# Altium PCB Load_Tester.PcbDoc
Units mil, origin at the board's own origin, x right, y up, seen from the top; angles counter-clockwise.
Board outline 1944 x 2589 mil, 2 copper layers (Top Layer, Bottom Layer); 81 components, 62 nets, 264 pads, 104 vias.
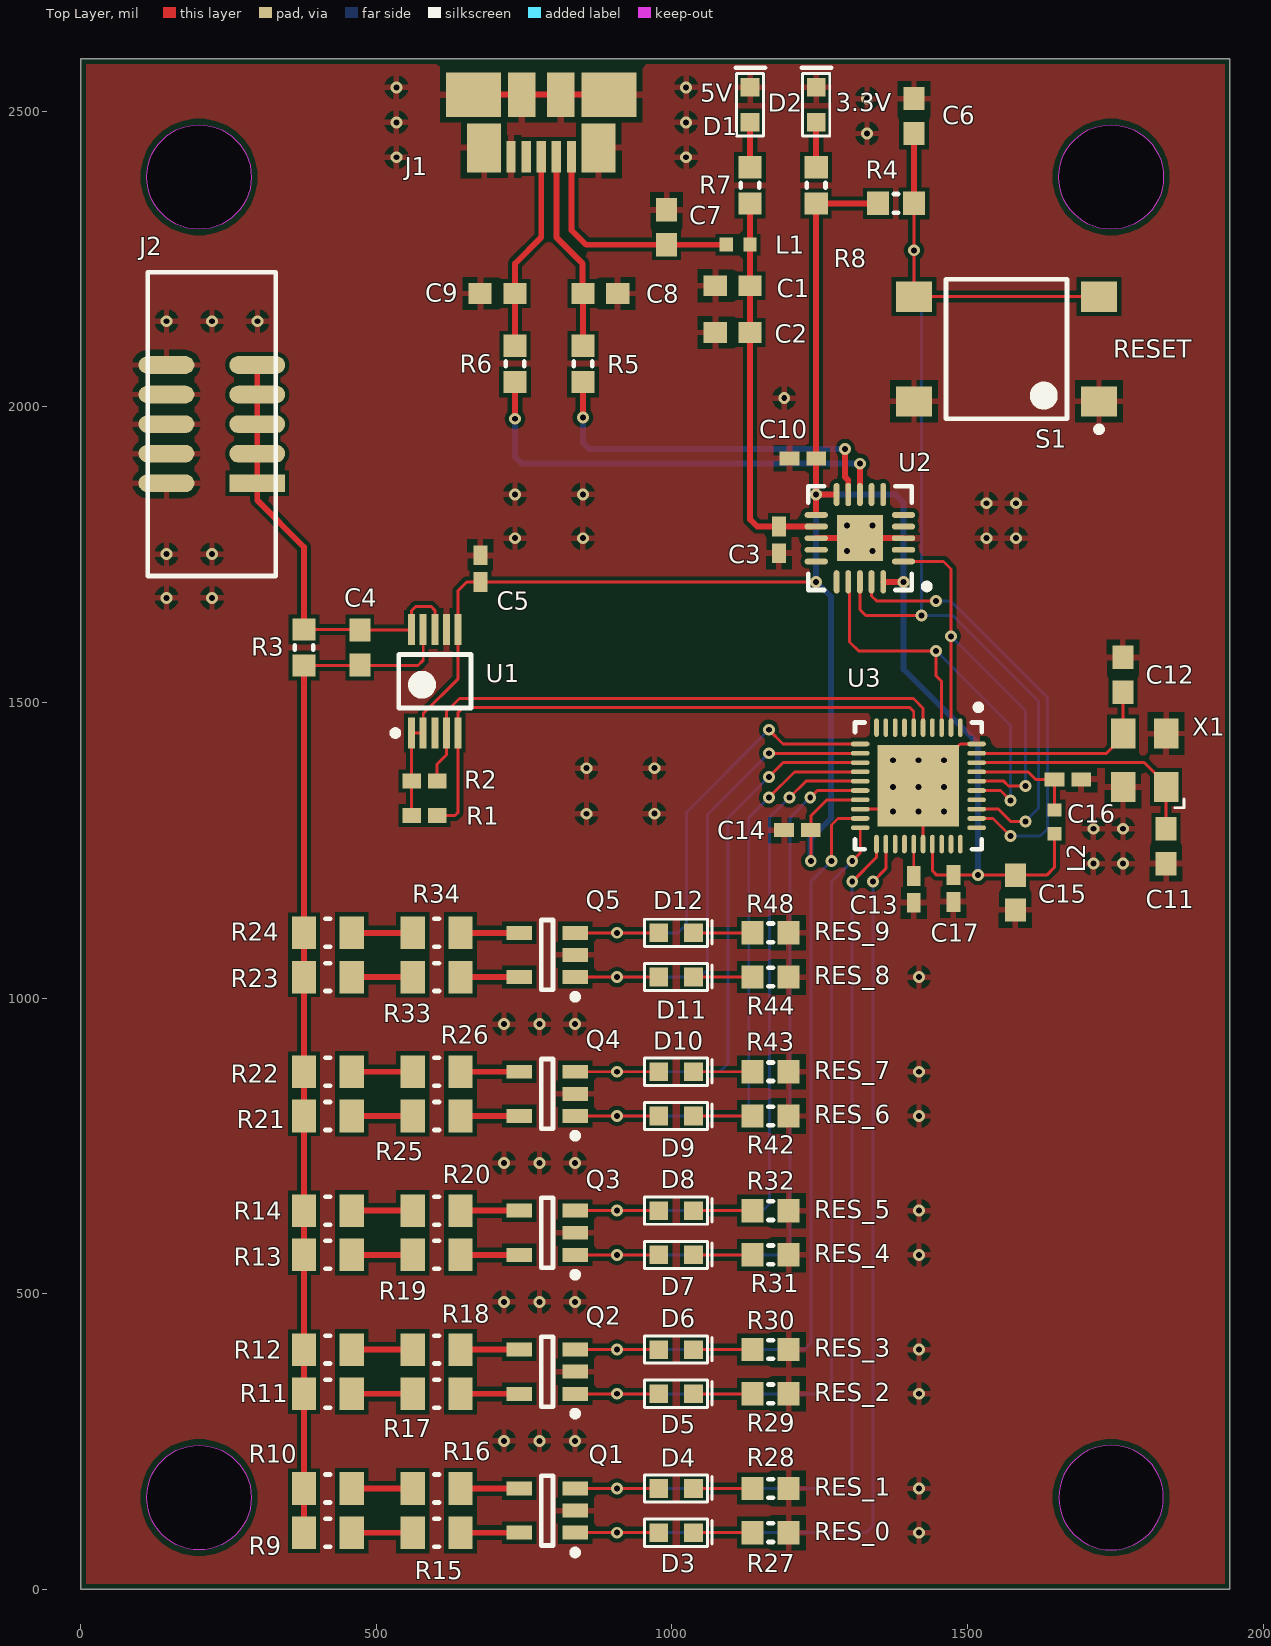
[diagram p0: Top Layer view]
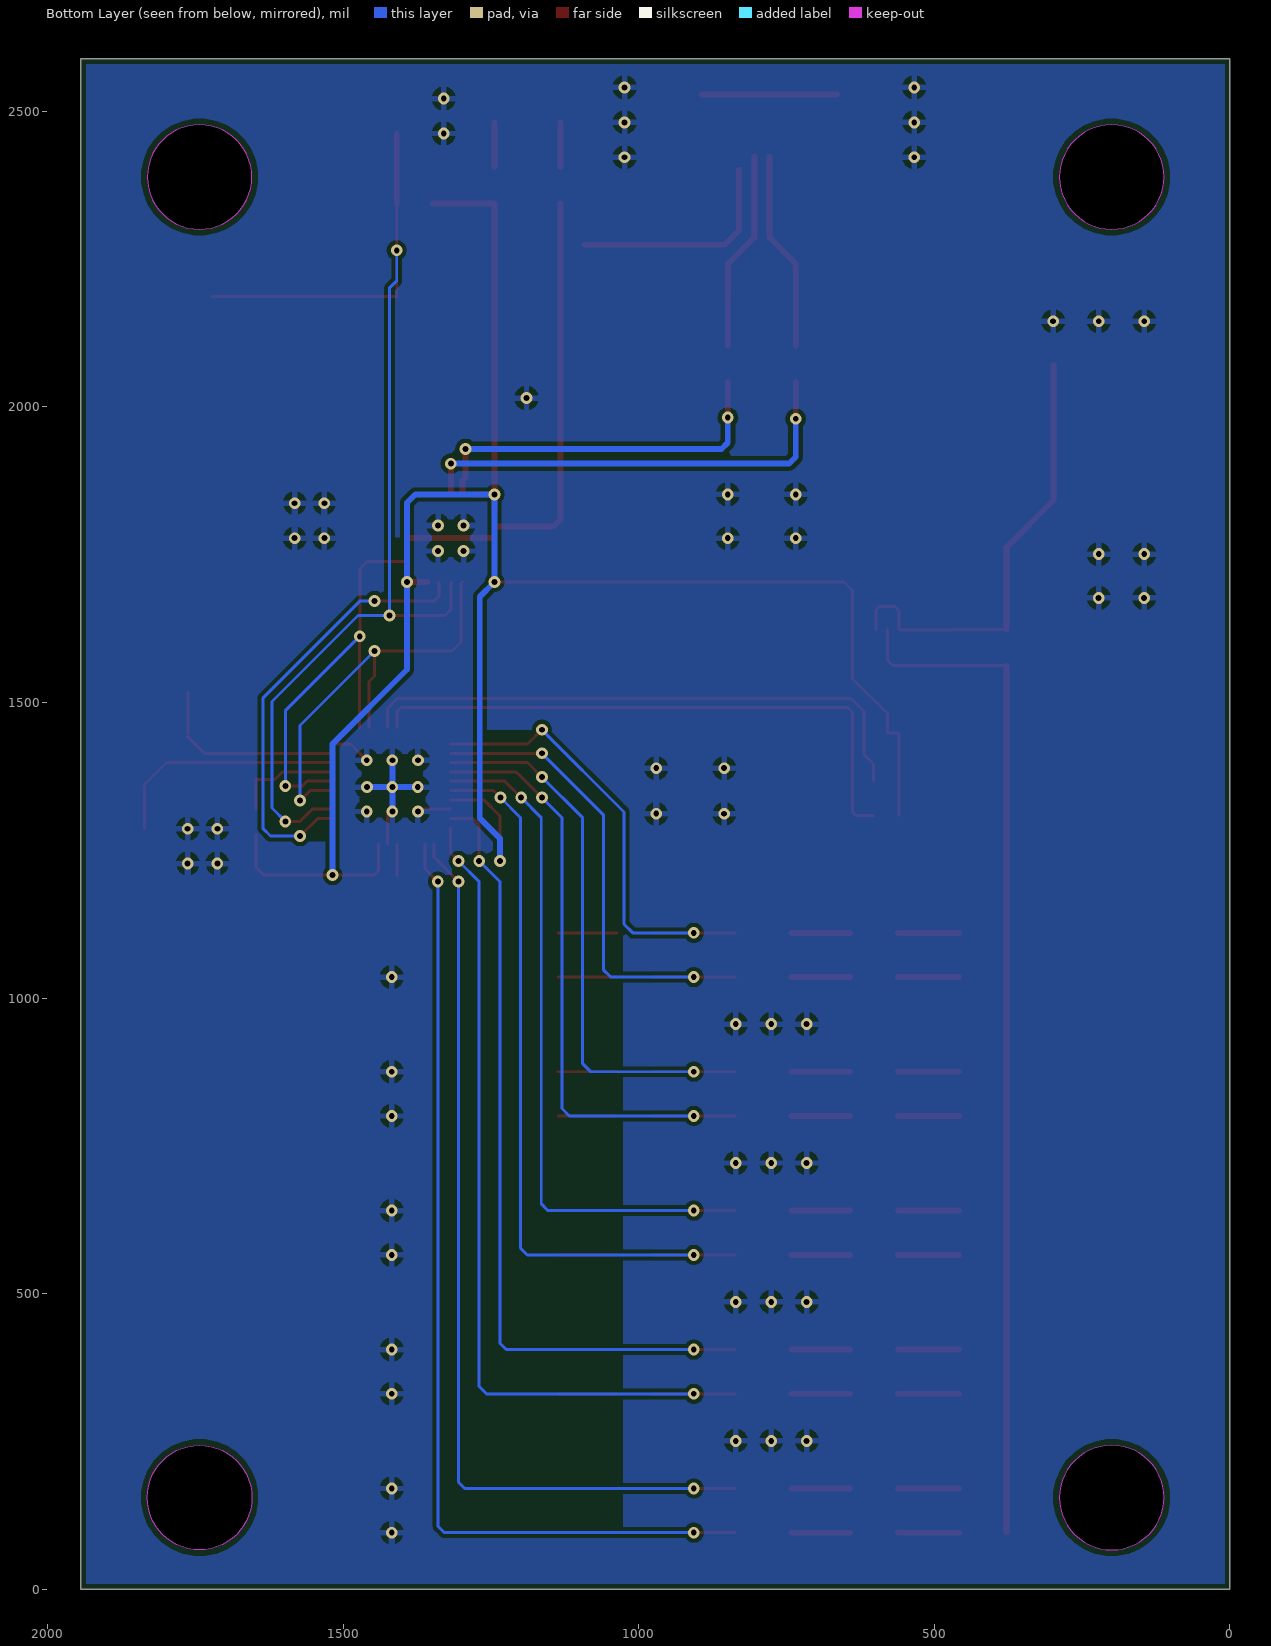
[diagram p1: Bottom Layer view, seen from below]

## Layer stack, top to bottom
Top Solder: solder mask 0.4, Solder Resist, Dk 3.5
Top Layer: signal copper 1.4
Dielectric 1: dielectric 12.6, FR-4, Dk 4.8
Bottom Layer: signal copper 1.4
Bottom Solder: solder mask 0.4, Solder Resist, Dk 3.5

## Board outline
0,0 1944,0 1944,2589 0,2589
cut-out: 200,2300.5 cw(c200,2389) 111.5,2389 cw(c200,2389) 200,2477.5 cw(c200,2389) 288.5,2389 cw(c200,2389)
cut-out: 1743,2300.5 cw(c1743,2389) 1654.5,2389 cw(c1743,2389) 1743,2477.5 cw(c1743,2389) 1831.5,2389 cw(c1743,2389)
cut-out: 1654.5,155 ccw(c1743,155) 1743,66.5 ccw(c1743,155) 1831.5,155 ccw(c1743,155) 1743,243.5 ccw(c1743,155)
cut-out: 200,66.5 cw(c200,155) 111.5,155 cw(c200,155) 200,243.5 cw(c200,155) 288.5,155 cw(c200,155)

## Design rules (kind name [scope] priority, off if disabled: settings)
Clearance [All] p1: gap=7
PolygonConnect [All] p1: connectstyle=Relief reliefconductorwidth=10 reliefentries=4 polygonreliefangle="90 Angle" airgapwidth=10
RoutingVias [All] p1: holewidth=10 width=20 viastyle="Through Hole" minholewidth=10 minwidth=20 maxholewidth=10 maxwidth=20
SolderMaskExpansion [All] p1: expansion=4
Width [All] p1: maxlimit=10 minlimit=5 preferedwidth=5
30 further rules are at their usual default settings.

## Components (designator, comment, footprint, x,y, rotation, side; value= is the part's Value field where it differs from the comment)
C1 "CAP CER 4.7UF 35V X5R 0603" 0603_Cap_Generic 1102.65,2205 r0 top
C2 "CAP CER 22UF 10V X5R 0603" 0603_Cap_Generic 1102.65,2126 r180 top
C3 "CAP CER 0.1UF 25V X7R 0402" 0402_CAP_Generic 1181,1775.05 r90 top
C4 "CAP CER 0.1UF 25V X7R 0603" 0603_Cap_Generic 472,1593.09 r270 top
C5 "CAP CER 0.1UF 25V X7R 0402" 0402_CAP_Generic 676,1726.64 r90 top
C6 "CAP CER 1000PF 50V X7R 0603" 0603_Cap_Generic 1409.51,2492.13 r90 top
C7 "CAP CER 10000PF 50V X7R 0603" 0603_Cap_Generic 991,2304 r90 top
C8 "CAP CER 47PF 50V C0G 0603" 0603_Cap_Generic 879,2192 r0 top
C9 "CAP CER 47PF 50V C0G 0603" 0603_Cap_Generic 705.02,2192 r180 top
C10 "CAP CER 0.1UF 25V X7R 0402" 0402_CAP_Generic 1221.36,1913 r180 top
C11 "CAP CER 18PF 50V C0G 0603" 0603_Cap_Generic 1836,1257 r270 top
C12 "CAP CER 18PF 50V C0G 0603" 0603_Cap_Generic 1763,1547 r270 top
C13 "CAP CER 0.47UF 10V X5R 0402" 0402_CAP_Generic 1409.13,1184 r90 top
C14 "CAP CER 0.1UF 25V X7R 0402" 0402_CAP_Generic 1212.36,1284 r180 top
C15 "CAP CER 10UF 10V JB 0603" 0603_Cap_Generic 1581,1178.47 r270 top
C16 "CAP CER 0.1UF 25V X7R 0402" 0402_CAP_Generic 1670,1370 r0 top
C17 "CAP CER 4.7UF 10V X5R 0402" 0402_CAP_Generic 1476,1185.36 r270 top
D1 "LED SMARTLED GREEN 570NM 0603" 0603_LED_with_mark 1132.18,2511 r90 top
D2 "LED SMARTLED GREEN 570NM 0603" 0603_LED_with_mark 1244,2511 r90 top
D3 "LED SMARTLED RED 630NM 0603 SMD" 0603_Diode-LED_Generic 1007,95.65 r0 top
D4 "LED SMARTLED RED 630NM 0603 SMD" 0603_Diode-LED_Generic 1007,170.4 r0 top
D5 "LED SMARTLED RED 630NM 0603 SMD" 0603_Diode-LED_Generic 1007,330.6 r0 top
D6 "LED SMARTLED RED 630NM 0603 SMD" 0603_Diode-LED_Generic 1007,405.4 r0 top
D7 "LED SMARTLED RED 630NM 0603 SMD" 0603_Diode-LED_Generic 1007,565.6 r0 top
D8 "LED SMARTLED RED 630NM 0603 SMD" 0603_Diode-LED_Generic 1007,640.4 r0 top
D9 "LED SMARTLED RED 630NM 0603 SMD" 0603_Diode-LED_Generic 1007,800.6 r0 top
D10 "LED SMARTLED RED 630NM 0603 SMD" 0603_Diode-LED_Generic 1007,875.4 r0 top
D11 "LED SMARTLED RED 630NM 0603 SMD" 0603_Diode-LED_Generic 1007,1035.6 r0 top
D12 "LED SMARTLED RED 630NM 0603 SMD" 0603_Diode-LED_Generic 1007,1110.4 r0 top
J1 "USB_MICRO-SMT-F_47346-0001" USB_MICRO_SD-47346-001 779,2423.53 r180 top
J2 "IDC BOX HEADER 0.050 10 POS" "IDC BOX HEADER 0.050 10 POS" 298.49,1871 r180 top
L1 "FERRITE 1000 OHM" "FERRITE CHIP 1000 OHM 300MA 0402" 1112,2274.47 r0 top
L2 "FERRITE 1000 OHM" "FERRITE CHIP 1000 OHM 300MA 0402" 1647.36,1298 r270 top
Q1 "MOSFET 2N-CH 30V 2A TSMT5" "SOT23-5 Generic Package" 789,133 r180 top
Q2 "MOSFET 2N-CH 30V 2A TSMT5" "SOT23-5 Generic Package" 789,368 r180 top
Q3 "MOSFET 2N-CH 30V 2A TSMT5" "SOT23-5 Generic Package" 789,603 r180 top
Q4 "MOSFET 2N-CH 30V 2A TSMT5" "SOT23-5 Generic Package" 789,838 r180 top
Q5 "MOSFET 2N-CH 30V 2A TSMT5" "SOT23-5 Generic Package" 789,1073 r180 top
R1 "RES SMD 4.7K OHM 1% 1/10W 0402" 0402_Res_Generic 581.28,1309 r180 top
R2 "RES SMD 4.7K OHM 1% 1/10W 0402" 0402_Res_Generic 581.28,1367 r180 top
R3 "RES SMD 0.5 OHM 1% 1/8W 0603" 0603_Res_Generic 377.65,1593.09 r90 top
R4 "RES SMD 47K OHM 1% 1/10W 0603" 0603_Res_Generic 1379,2344.49 r180 top
R5 "RES SMD 27 OHM 1% 1/10W 0603" 0603_Res_Generic 849.47,2073 r270 top
R6 "RES SMD 27 OHM 1% 1/10W 0603" 0603_Res_Generic 734.54,2073 r270 top
R7 "RES SMD 1K OHM 5% 1/10W 0603 (2)" 0603_Res_Generic 1132.18,2375 r270 top
R8 "RES SMD 806 OHM 1% 1/10W 0603" 0603_Res_Generic 1244,2375 r270 top
R9 "RES SMD 51K OHM 1% 1/8W 0805" 0805_Res_Generic 418,95.6 r180 top
R10 "RES SMD 25.5K OHM 1% 1/8W 0805" 0805_Res_Generic 418,170.4 r180 top
R11 "RES SMD 12.7K OHM 1% 1/8W 0805" 0805_Res_Generic 418,330.6 r180 top
R12 "RES SMD 6.2K OHM 1% 1/8W 0805" 0805_Res_Generic 418,405.4 r180 top
R13 "RES SMD 3K OHM 1% 1/8W 0805" 0805_Res_Generic 418,565.6 r180 top
R14 "RES SMD 1K OHM 1% 1/8W 0805" 0805_Res_Generic 418,640.4 r180 top
R15 "RES SMD 150 OHM 1% 1/8W 0805" 0805_Res_Generic 602,95.6 r180 top
R16 "RES SMD 75 OHM 1% 1/8W 0805" 0805_Res_Generic 602,170.4 r180 top
R17 "RES SMD 88.7 OHM 1% 1/8W 0805" 0805_Res_Generic 602,330.6 r180 top
R18 "RES SMD 196 OHM 1% 1/8W 0805" 0805_Res_Generic 602,405.4 r180 top
R19 "RES SMD 196 OHM 1% 1/8W 0805" 0805_Res_Generic 602,565.6 r180 top
R20 "RES SMD 604 OHM 1% 1/8W 0805" 0805_Res_Generic 602,640.4 r180 top
R21 "RES SMD 680 OHM 1% 1/2W 0805" 0805_Res_Generic 418,800.6 r180 top
R22 "RES SMD 200 OHM 1% 1/2W 0805" 0805_Res_Generic 418,875.4 r180 top
R23 "RES SMD 100 OHM 0.1% 5/8W 0805" 0805_Res_Generic 418,1035.6 r180 top
R24 "DNP" 0805_Res_Generic 418,1110.4 r180 top
R25 "RES SMD 120 OHM 1% 1/2W 0805" 0805_Res_Generic 602,800.6 r180 top
R26 "RES SMD 200 OHM 1% 1/2W 0805" 0805_Res_Generic 602,875.4 r180 top
R27 "RES SMD 750 OHM 1% 1/10W 0603" 0603_Res_Generic 1167,95.65 r180 top
R28 "RES SMD 750 OHM 1% 1/10W 0603" 0603_Res_Generic 1167,170.4 r180 top
R29 "RES SMD 750 OHM 1% 1/10W 0603" 0603_Res_Generic 1167,330.6 r180 top
R30 "RES SMD 750 OHM 1% 1/10W 0603" 0603_Res_Generic 1167,405.4 r180 top
R31 "RES SMD 750 OHM 1% 1/10W 0603" 0603_Res_Generic 1167,565.6 r180 top
R32 "RES SMD 750 OHM 1% 1/10W 0603" 0603_Res_Generic 1167,640.4 r180 top
R33 "RES SMD 100 OHM 0.1% 5/8W 0805" 0805_Res_Generic 602,1035.6 r180 top
R34 "DNP" 0805_Res_Generic 602,1110.4 r180 top
R42 "RES SMD 750 OHM 1% 1/10W 0603" 0603_Res_Generic 1167,800.6 r180 top
R43 "RES SMD 750 OHM 1% 1/10W 0603" 0603_Res_Generic 1167,875.4 r180 top
R44 "RES SMD 750 OHM 1% 1/10W 0603" 0603_Res_Generic 1167,1035.6 r180 top
R48 "RES SMD 750 OHM 1% 1/10W 0603" 0603_Res_Generic 1167,1110.4 r180 top
S1 "SWITCH TACTILE SPST-NO 0.05A 12V" "SWITCH TACTILE SPST-NO 0.05A 12V" 1566.01,2098 r180 top
U1 "INA226AIDGSR" 10-TFSOP 599,1536 r90 top
U2 "FT231XQ-R" "IC USB SERIAL FULL UART 20QFN" 1318,1778 r180 top
U3 "IC MCU 16BIT 8KB FLASH 40WQFN" "IC MCU 16BIT 8KB FLASH 40WQFN" 1417,1359 r270 top
X1 "CRYSTAL 13.56MHZ 10PF SMD" "CRYSTAL 13.56MHZ 10PF SMD" 1836,1357 r90 top

## Footprints (in the part's own frame and the unit in brackets; to place one, negate y for a bottom-side part, rotate by r counter-clockwise, add the part's x,y. Pads: shape width x height; smd on the part's side, far side on the other; paste and mask are expansions set on the pad)
10-TFSOP [mm]
  rect 1.35x0.3 smd mask+0.025: 1(-2.225,1) 2(-2.225,0.5) 3(-2.225,0) 4(-2.225,-0.5) 5(-2.225,-1) 6(2.225,-1) 7(2.225,-0.5) 8(2.225,0) 9(2.225,0.5) 10(2.225,1)
  silkscreen extent -2.35,-1.55 1.15,1.82, body extent -1.55,-1.55 1.55,1.55, height 1.1
0402_CAP_Generic [mm] "IPC Generated"
  rect 0.85x0.6 smd: 1(-0.575,0) 2(0.575,0)
  body extent -0.53,-0.28 0.53,0.27, height 0.55
0402_Res_Generic [mm] "IPC Generated"
  rect 0.8x0.65 smd mask+0.025: 1(-0.55,0) 2(0.55,0)
  body extent -0.52,-0.27 0.53,0.28, height 0.35
0603_Cap_Generic [mm] "IPC Generated"
  rect 1x0.9 smd: 1(-0.75,0) 2(0.75,0)
  body extent -0.85,-0.45 0.85,0.45, height 0.9
0603_Diode-LED_Generic [mm] "IPC"
  rect 0.8x0.8 smd: A(-0.75,0) C(0.75,0)
  silkscreen extent -1.35,-0.58 1.55,0.58, body extent -0.9,-0.4 0.9,0.4, height 0.6
0603_LED_with_mark [mm] "IPC"
  rect 0.8x0.8 smd: 1(-0.75,0) 2(0.75,0)
  silkscreen extent -1.35,-0.65 1.59,0.62, body extent -0.9,-0.4 0.9,0.4, height 0.6
0603_Res_Generic [mm] "IPC Generated"
  rect 0.95x1 smd: 1(-0.775,0) 2(0.775,0)
  silkscreen extent -0.1,-0.4 0.1,0.4, body extent -0.82,-0.48 0.82,0.47, height 0.5
0805_Res_Generic [mm] "IPC Generated"
  rect 1.05x1.4 smd: 1(-1.025,0) 2(1.025,0)
  silkscreen extent -0.1,-0.6 0.1,0.6, body extent -1.1,-0.7 1.1,0.7, height 0.5
"CRYSTAL 13.56MHZ 10PF SMD" [mm] "Crystal SMD 4-pin 3.2mm X 2.5mm"
  rect 1.3x1.05 smd: 1(0,0) 2(2.3,0) 3(2.3,1.85) 4(0,1.85)
  silkscreen extent -0.89,-0.76 -0.51,-0.38, body extent -0.55,-0.43 2.85,2.27, height 0.8
"FERRITE CHIP 1000 OHM 300MA 0402" [mm] "BOI Generated"
  rect 0.575x0.6 smd mask+0.127: 1(-0.513,0) 2(0.513,0)
  body extent -0.53,-0.28 0.53,0.27, height 0.55
"IC MCU 16BIT 8KB FLASH 40WQFN" [mm] "QFN, 40-Leads, Body 5x5mm, Pitch 0.4mm, Thermal Pad 3.5x3.5mm, IPC Medium Density"
  oval 0.8x0.2 smd mask+0.025: 1(-2.5,1.8) 2(-2.5,1.4) 3(-2.5,1) 4(-2.5,0.6) 5(-2.5,0.2) 6(-2.5,-0.2) 7(-2.5,-0.6) 8(-2.5,-1) 9(-2.5,-1.4) 10(-2.5,-1.8) 21(2.5,-1.8) 22(2.5,-1.4) 23(2.5,-1) 24(2.5,-0.6) 25(2.5,-0.2) 26(2.5,0.2) 27(2.5,0.6) 28(2.5,1) 29(2.5,1.4) 30(2.5,1.8)
  oval 0.2x0.8 smd mask+0.025: 11(-1.8,-2.5) 12(-1.4,-2.5) 13(-1,-2.5) 14(-0.6,-2.5) 15(-0.2,-2.5) 16(0.2,-2.5) 17(0.6,-2.5) 18(1,-2.5) 19(1.4,-2.5) 20(1.8,-2.5) 31(1.8,2.5) 32(1.4,2.5) 33(1,2.5) 34(0.6,2.5) 35(0.2,2.5) 36(-0.2,2.5) 37(-0.6,2.5) 38(-1,2.5) 39(-1.4,2.5) 40(-1.8,2.5)
  rect 3.5x3.5 smd mask+0.025: 41(0,0)
  silkscreen extent -3.5,-2.73 2.73,2.73, body extent -2.58,-2.57 2.57,2.58, height 0.8
"IC USB SERIAL FULL UART 20QFN" [mm] "QFN, 20-Leads, Body 4.00x4.00mm, Pitch 0.50mm, Thermal Pad 1.98x1.98mm, IPC Medium Density"
  oval 1x0.25 smd mask+0.025: 1(-1.875,1) 2(-1.875,0.5) 3(-1.875,0) 4(-1.875,-0.5) 5(-1.875,-1) 11(1.875,-1) 12(1.875,-0.5) 13(1.875,0) 14(1.875,0.5) 15(1.875,1)
  oval 0.25x1 smd mask+0.025: 6(-1,-1.875) 7(-0.5,-1.875) 8(0,-1.875) 9(0.5,-1.875) 10(1,-1.875) 16(1,1.875) 17(0.5,1.875) 18(0,1.875) 19(-0.5,1.875) 20(-1,1.875)
  rect 1.98x1.98 smd mask+0.025: 21(0,0)
  silkscreen extent -3,-2.22 2.22,2.22, body extent -2.07,-2.07 2.07,2.07, height 0.8
"IDC BOX HEADER 0.050 10 POS" [mm]
  rect 2.4x0.76 smd: 1(0,0)
  oval 2.4x0.76 smd: 2(3.9,0) 3(0,-1.27) 4(3.9,-1.27) 5(0,-2.54) 6(3.9,-2.54) 7(0,-3.81) 8(3.9,-3.81) 9(0,-5.08) 10(3.9,-5.08)
  silkscreen extent -0.8,-9.07 4.7,3.99
"SOT23-5 Generic Package" [mm] "SOT23-5, 5-Leads, Body 2.90x2.80mm, Pitch 0.95mm, IPC Medium Density"
  rect 1.1x0.6 smd: 1(-1.2,0.95) 2(-1.2,0) 3(-1.2,-0.95) 4(1.2,-0.95) 5(1.2,0.95)
  silkscreen extent -1.33,-1.5 0.25,1.92, body extent -0.87,-1.5 0.87,1.5, height 1.45
"SWITCH TACTILE SPST-NO 0.05A 12V" [mm] "SWITCH TACTILE SPST-NO 0.05A 12V"
  rect 1.55x1.3 smd: 1(-3.975,2.25) 2(3.975,2.25) 3(-3.975,-2.25) 4(3.975,-2.25)
  silkscreen extent -4.1,-3 2.6,3.57, body extent -3,-3 3,3, height 4.4
USB_MICRO_SD-47346-001 [mm] "MICRO USB FEMALE SMT"
  rect 0.4x1.35 smd mask+0.076: 1(-1.3,0) 2(-0.65,0) 3(0,0) 4(0.65,0) 5(1.3,0)
  rect 1.475x2.1 smd mask+0.076: 6(-2.462,-0.375) 7(2.463,-0.375)
  rect 2.375x1.9 smd mask+0.076: 8(-2.912,-2.66) 9(2.913,-2.66)
  rect 1.175x1.9 smd mask+0.076: 10(-0.837,-2.66) 11(0.837,-2.66)
  body extent -3.96,-4.79 4.02,0.64, height 2.77

## Part data
C1: library part 100-00191
C2: library part 100-00205
C3 C5 C10 C14 C16: library part 100-00212
C4: library part 100-00193
C6: library part 100-00211
C7: library part 100-00189
C8 C9: library part 100-00190
C11 C12: library part 100-00209
C13: library part 100-00214
C15: library part 100-00208
C17: library part 100-00213
J1: "CONNECTOR MICRO USB B RECPT BTTM MOUNT ASSY"
L1 L2: library part "FERRITE CHIP 1000 OHM 300MA 0402", "FERRITE CHIP 1000 OHM 300MA 0402"
R7: "RES SMD 1K OHM 5% 1/10W 0603"
R24 R34: library part "RES SMD 0.0 OHM JUMPER 1/8W 0805", "RES SMD 0.0 OHM JUMPER 1/8W 0805"
U1: library part "IC MONITOR PWR/CURR BIDIR 10MSOP", "IC MONITOR PWR/CURR BIDIR 10MSOP"
U2: library part "IC USB SERIAL FULL UART 20QFN", "IC USB SERIAL FULL UART 20QFN"

## Via types
v1: diameter 20, hole 10, Top Layer to Bottom Layer, 104 vias

## Nets (pads, with @x,y where several pads share a name; then routed paths per layer and width w, separated by ;. In a path a pad name is that pad's centre, name@x,y a point inside that pad or via, vN(x,y) a via of type N, cw(c..) or ccw(c..) an arc to the next point about the centre after c; other vN are vias at no path point)
5V: C1.2 C2.1 C3.2 L1.2 R7.2 U2.12 | length 651.7
  Top Layer w10: R7.2 L1.2 C1.2 C2.1 1132.18,1809.82 1144.32,1797.69 C3.2 U2.12
AVCC: C16.1 L2.1 U3.37 | length 189
  Top Layer w5: U3.37 1603,1382.62 1615.62,1370 C16.1 L2.1
GND: C1.1 C2.2 C3.1 C5.2 C6.2 C7.2 C8.2 C9.2 C10.2 C11.2 C12.1 C13.1 C14.2 C15.2 C16.2 C17.2 D1.2 D2.2 J1.5 J1.6 J1.7 J1.8 J1.9 J1.10 J1.11 J2.2 J2.4 J2.6 J2.8 J2.10 Q1.2 Q2.2 Q3.2 Q4.2 Q5.2 R27.1 R28.1 R29.1 R30.1 R31.1 R32.1 R42.1 R43.1 R44.1 R48.1 S1.1 S1.2 U1.7 U2.3 U2.13 U2.21 U3.18 U3.26 U3.40 U3.41 X1.2 X1.4 | length 722.4
  Top Layer w5: U3.18 U3.41@1369.76,1319.63 ; U3.26 U3.41@1424.87,1315.69 ; v1(1460.31,1402.31) 1487.87,1429.87 U3.40
  Top Layer w10: J1.9 J1.11 J1.10 J1.8 ; U2.13 U2.21 U2.3
  Bottom Layer w10: v1(1374,1357) v1(1417,1357) ; v1(1417,1315.69) v1(1417,1357) ; v1(1417,1402.31) v1(1417,1357) ; v1(1460,1357) v1(1417,1357)
  other v1: 1418,95.65 1418,170.4 716,251 776,251 836,251 1418,330.6 1418,405.4 716,486 776,486 836,486 1418,565.6 1418,640.4 716,721 776,721 836,721 1418,800.6 1418,875.4 716,956 776,956 836,956 1418,1035.6 1713,1227.47 1763.17,1227.47 1713,1286.53 1763.17,1286.53 855.54,1311.89 970.47,1311.94 1373.69,1315.69 1460.31,1315.69 855.54,1388.89 970.47,1388.94 1373.69,1402.31 145.06,1677 222.06,1677 145,1751 222,1751 1296.35,1756.35 1339.65,1756.35 734.54,1778 849.47,1778 1532,1778 1582.17,1778 1296.35,1799.65 1339.65,1799.65 1532,1837.06 1582.17,1837.06 734.54,1852 849.47,1852 1190,2015 145,2145 222,2145 299,2145 534,2422.42 1024,2422.42 1330,2462.6 534,2481.47 1024,2481.47 1330,2521.65 534,2540.53 1024,2540.53
NetC7_1: C7.1 J1.1 L1.1 | length 373.3
  Top Layer w10: J1.1@830.18,2400.53 830.18,2299 854.71,2274.47 L1.1
NetC8_1: C8.1 J1.2 R5.1 | length 336
  Top Layer w10: J1.2 804.59,2287 849.06,2242.53 C8.1@849.06,2194.41 ; R5.1 C8.1
NetC9_1: C9.1 J1.3 R6.1 | length 338.4
  Top Layer w10: R6.1 C9.1 734.53,2242.53 779,2287 J1.3
NetC11_1: C11.1 U3.38 X1.1 | length 406.4
  Top Layer w5: U3.38 1799,1398.37 X1.1@1836,1361.37 ; C11.1 X1.1
NetC12_2: C12.2 U3.39 X1.3 | length 329.5
  Top Layer w5: U3.39 1735,1414.12 X1.3@1763.17,1442.28 ; X1.3@1763,1447.39 C12.2
NetD1_1: D1.1 R7.1 | length 76
  Top Layer w10: R7.1 D1.1
NetD2_1: D2.1 R8.1 | length 76
  Top Layer w10: R8.1 D2.1
NetD3_C: D3.C R27.2 | length 100
  Top Layer w5: D3.C R27.2
NetD4_C: D4.C R28.2 | length 100
  Top Layer w5: D4.C R28.2
NetD5_C: D5.C R29.2 | length 100
  Top Layer w5: D5.C R29.2
NetD6_C: D6.C R30.2 | length 100
  Top Layer w5: D6.C R30.2
NetD7_C: D7.C R31.2 | length 100
  Top Layer w5: D7.C R31.2
NetD8_C: D8.C R32.2 | length 100
  Top Layer w5: D8.C R32.2
NetD9_C: D9.C R42.2 | length 100
  Top Layer w5: D9.C R42.2
NetD10_C: D10.C R43.2 | length 100
  Top Layer w5: D10.C R43.2
NetD11_C: D11.C R44.2 | length 100
  Top Layer w5: D11.C R44.2
NetD12_C: D12.C R48.2 | length 100
  Top Layer w5: D12.C R48.2
NetQ1_4: Q1.4 R16.1 | length 99.4
  Top Layer w10: R16.1 Q1.4
NetQ1_5: Q1.5 R15.1 | length 99.4
  Top Layer w10: R15.1 Q1.5
NetQ2_4: Q2.4 R18.1 | length 99.4
  Top Layer w10: R18.1 Q2.4
NetQ2_5: Q2.5 R17.1 | length 99.4
  Top Layer w10: R17.1 Q2.5
NetQ3_4: Q3.4 R20.1 | length 99.4
  Top Layer w10: R20.1 Q3.4
NetQ3_5: Q3.5 R19.1 | length 99.4
  Top Layer w10: R19.1 Q3.5
NetQ4_4: Q4.4 R26.1 | length 99.4
  Top Layer w10: R26.1 Q4.4
NetQ4_5: Q4.5 R25.1 | length 99.4
  Top Layer w10: R25.1 Q4.5
NetQ5_4: Q5.4 R34.1 | length 99.4
  Top Layer w10: R34.1 Q5.4
NetQ5_5: Q5.5 R33.1 | length 99.4
  Top Layer w10: R33.1 Q5.5
NetR5_2: R5.2 U2.9 | length 630.2
  Top Layer w10: v1(849.47,1982) R5.2 ; v1(1293,1929) 1293,1881.31 1298.32,1876 U2.9
  Bottom Layer w10: v1(849.47,1982) 849.47,1939.53 860,1929 v1(1293,1929)
NetR6_2: R6.2 U2.8 | length 767.4
  Top Layer w10: v1(734.54,1980) R6.2 ; U2.8 v1(1318,1904)
  Bottom Layer w10: v1(734.54,1980) 734.54,1915.46 746,1904 v1(1318,1904)
NetR9_1: R9.1 R15.2 | length 103.3
  Top Layer w10: R9.1 R15.2
NetR10_1: R10.1 R16.2 | length 103.3
  Top Layer w10: R10.1 R16.2
NetR11_1: R11.1 R17.2 | length 103.3
  Top Layer w10: R11.1 R17.2
NetR12_1: R12.1 R18.2 | length 103.3
  Top Layer w10: R12.1 R18.2
NetR13_1: R13.1 R19.2 | length 103.3
  Top Layer w10: R13.1 R19.2
NetR14_1: R14.1 R20.2 | length 103.3
  Top Layer w10: R14.1 R20.2
NetR21_1: R21.1 R25.2 | length 103.3
  Top Layer w10: R21.1 R25.2
NetR22_1: R22.1 R26.2 | length 103.3
  Top Layer w10: R22.1 R26.2
NetR23_1: R23.1 R33.2 | length 103.3
  Top Layer w10: R23.1 R33.2
NetR24_1: R24.1 R34.2 | length 103.3
  Top Layer w10: R24.1 R34.2
POST_SENSE: C4.2 R3.1 R9.2 R10.2 R11.2 R12.2 R13.2 R14.2 R21.2 R22.2 R23.2 R24.2 U1.9 | length 1724.5
  Top Layer w5: R3.1 570.57,1562.57 579.31,1571.31 U1.9
  Top Layer w10: R9.2 R3.1
PRE_SENSE: C4.1 J2.1 J2.3 J2.5 J2.7 J2.9 R3.2 U1.8 U1.10 | length 770.5
  Top Layer w5: R3.2 C4.1@471.02,1623.6 ; C4.1 U1.10@559.63,1622.61 ; U1.10 559.63,1655.37 566.93,1662.67 592.33,1662.67 599,1656 U1.8
  Top Layer w10: J2.9 J2.7 J2.5 J2.3 J2.1 298.49,1842 377.65,1762.84 R3.2
RES_0: D3.A Q1.1 U3.22 | length 1771.5
  Top Layer w5: Q1.1 936.94,95.6 ; v1(907,95.65) D3.A ; v1(1340,1197) 1361.88,1218.88 U3.22
  Bottom Layer w5: v1(907,95.65) 1328.65,95.65 1340,107 v1(1340,1197)
RES_1: D4.A Q1.3 U3.21 | length 1640.2
  Top Layer w5: Q1.3 v1(907,170.4) D4.A ; v1(1305,1197) 1346.13,1238.13 U3.21
  Bottom Layer w5: v1(907,170.4) 1294.4,170.4 1305,181 v1(1305,1197)
RES_2: D5.A Q2.1 U3.20 | length 1474.6
  Top Layer w5: Q2.1 v1(907,330.6) 977,330.6 D5.A ; v1(1305,1232) 1318.57,1245.57 U3.20
  Bottom Layer w5: v1(907,330.6) 1257.6,330.6 1270,343 1270,1197 v1(1305,1232)
RES_3: D6.A Q2.3 U3.19 | length 1417.5
  Top Layer w5: Q2.3 v1(907,405.4) D6.A ; v1(1270,1232) 1270,1293 1280.88,1303.88 1299.27,1303.88 ; 1300,1303.88 U3.19
  Bottom Layer w5: v1(907,405.4) 1224.4,405.4 1235,416 1235,1197 v1(1270,1232)
RES_4: D7.A Q3.1 U3.16 | length 1304.7
  Top Layer w5: Q3.1 v1(907,565.6) 977,565.6 D7.A ; v1(1234,1339.13) 1246,1351.13 U3.16
  Bottom Layer w5: v1(907,565.6) 1188.6,565.6 1200,577 1200,1305.13 v1(1234,1339.13)
RES_5: D8.A Q3.3 U3.15 | length 1236.3
  Top Layer w5: Q3.3 v1(907,640.4) 977,640.4 D8.A ; v1(1199,1339.13) 1226.75,1366.87 U3.15
  Bottom Layer w5: v1(907,640.4) 1153.4,640.4 1165,652 1165,1305.13 v1(1199,1339.13)
RES_6: D9.A Q4.1 U3.14 | length 1082.2
  Top Layer w5: Q4.1 v1(907,800.6) 977,800.6 D9.A ; v1(1164,1339.13) 1207.5,1382.62 U3.14
  Bottom Layer w5: v1(907,800.6) 1117.6,800.6 1130,813 1130,1305.13 v1(1164,1339.13)
RES_7: D10.A Q4.3 U3.13 | length 1013.1
  Top Layer w5: Q4.3 v1(907,875.4) 977,875.4 D10.A ; v1(1164,1374) 1188.37,1398.37 U3.13
  Bottom Layer w5: v1(907,875.4) 1081.4,875.4 1095,889 1095,1305 v1(1164,1374)
RES_8: D11.A Q5.1 U3.12 | length 863.1
  Top Layer w5: Q5.1 v1(907,1035.6) D11.A ; v1(1164,1414.12) U3.12
  Bottom Layer w5: v1(907,1035.6) 1047.6,1035.6 1060,1048 1060,1310.12 v1(1164,1414.12)
RES_9: D12.A Q5.3 U3.11 | length 816.4
  Top Layer w5: Q5.3 v1(907,1110.4) 977,1110.4 D12.A ; v1(1164,1454) 1188.13,1429.87 U3.11
  Bottom Layer w5: v1(907,1110.4) 1010.4,1110.4 1025,1125 1025,1315 v1(1164,1454)
RESET: C6.1 R4.1 S1.3 S1.4 U2.18 U3.33 | length 1929.3
  Top Layer w5: U2.18 1318,1657 1328,1647 v1(1422,1647) ; R4.1 v1(1409.51,2264.98) S1.4 S1.3 ; U3.33 1552.37,1319.63 1573,1299 v1(1598,1299)
  Top Layer w10: R4.1 C6.1
  Bottom Layer w5: v1(1409.51,2264.98) 1409.51,2213.49 1422,2201 v1(1422,1647) 1475.21,1647 1620.5,1501.71 1620.5,1321.5 v1(1598,1299)
SCL: R1.1 U1.5 U3.6 | length 1011.1
  Top Layer w5: R1.1 633,1309 638.37,1314.37 U1.5 638.37,1483.37 646.68,1491.68 1402.32,1491.68 1409.13,1484.87 U3.6
SDA: R2.1 U1.4 U3.5 | length 979.3
  Top Layer w5: R2.1 602.94,1395.94 618.68,1411.68 U1.4 618.68,1484.9 640.47,1506.68 1408.53,1506.68 1424.87,1490.34 U3.5
TEST: U2.19 U3.32 | length 752.1
  Top Layer w5: U2.19 1337.68,1680.32 1346,1672 v1(1447,1672) ; U3.32 1543.12,1303.88 v1(1573,1274)
  Bottom Layer w5: v1(1447,1672) 1471.43,1672 1635.5,1507.93 1635.5,1286.5 1623,1274 v1(1573,1274)
USB_RXDI: U2.1 U3.2 U3.36 | length 744.9
  Top Layer w5: U2.1 1459.37,1738.63 1472,1726 v1(1472,1612) ; U3.2 v1@1472.12,1611.88 ; U3.36 1561.34,1366.87 1569.21,1359 v1(1598,1359)
  Bottom Layer w5: v1(1472,1612) 1598,1486 v1(1598,1359)
USB_TXDO: U2.17 U3.3 U3.35 | length 758.8
  Top Layer w5: U2.17 1300.58,1701.92 1300.58,1602.42 1316,1587 v1(1447,1587) 1447,1545 1456.37,1535.63 U3.3 ; U3.35 1555.87,1351.13 v1(1573,1334)
  Bottom Layer w5: v1(1447,1587) 1573,1461 v1(1573,1334)
VCORE: C13.2 U3.25 | length 53.9
  Top Layer w5: C13.2 U3.25
VDD_3V3: C5.1 C10.1 C14.1 C15.1 C17.1 L2.2 R1.2 R2.2 R4.2 R8.2 U1.1 U1.2 U1.6 U2.10 U2.11 U2.20 U3.17 U3.27 | length 3703.8
  Top Layer w5: R1.2 R2.2 U1.1 U1.2 579.31,1481.31 638.37,1540.37 U1.6 638.37,1689.37 653,1704 v1(1244,1704) ; v1(1235,1232) C14.1 1235,1308 1262.38,1335.38 U3.17 ; U3.27 1440.62,1215.38 1448,1208 C17.1 v1(1518,1208) C15.1 1634,1208 1647.36,1221.36 L2.2
  Top Layer w10: U2.11@1244,1817.87 v1(1244,1852) ; U2.10@1278.13,1852 v1(1244,1852) ; R4.2 R8.2 C10.1 v1(1244,1852) ; U2.20@1357.79,1704 v1(1392,1704)
  Bottom Layer w10: v1@1234.64,1232.36 1234.64,1269.64 1269,1304 1269,1679 v1(1244,1704) v1(1244,1852) 1378,1852 1392,1838 v1(1392,1704) 1392,1556 1518,1430 v1(1518,1208)
pads on no net: J1.4 U1.3 U2.2 U2.4 U2.5 U2.6 U2.7 U2.14 U2.15 U2.16 U3.1 U3.4 U3.7 U3.8 U3.9 U3.10 U3.23 U3.24 U3.28 U3.29 U3.30 U3.31 U3.34

## Polygon pours and split planes (outlines as drawn)
GND on Bottom Layer "Top Layer-No Net" (solid, remove dead copper, pour order 26): 9,2580 1935,2580 1935,1780 1244,1780 1244,1704 1269,1679 1269,1454 1164,1454 1025,1315 9,1315
GND on Bottom Layer "Top Layer-No Net" (solid, remove dead copper, pour order 24): 976,96 976,9 1476,9 1476,96
GND on Bottom Layer "Top Layer-No Net" (solid, remove dead copper, pour order 20): 9,1353 617,1353 1026,1353 1026,9 9,9
GND on Bottom Layer "Top Layer-No Net" (solid, remove dead copper, pour order 6): 1463,985 1935,985 1935,1838 1392,1838 1392,1704 1413,1692 1447,1672 1584.5,1534.5 1584.5,1310.63 1584.5,1264.19 1507.19,1264.19 1486,1206.13 1486,1194 1464,1194 1462,1194 1462,1188
GND on Bottom Layer "Top Layer-No Net" (solid, remove dead copper, pour order 2): 1339,1231 1412,1231 1935,1231 1935,9 1339,9
GND on Bottom Layer "Top Layer-No Net" (solid, remove dead copper, pour order 0): 1244,1852 1244,1704 1269,1679 1269,1319.63 1234,1319.63 1234,1197 1270,1197 1294,1197 1518,1197 1518,1504 1392,1630 1392,1838 1378,1852
GND on Top Layer "Top Layer-No Net" (solid, remove dead copper, pour order 18): 1305,1232 1348,1232 1348,1492 729.37,1492 729.37,1623.6 378,1623.6 378,1492 9,1492 9,9 1305,9
GND on Top Layer "Top Layer-No Net" (solid, remove dead copper, pour order 16): 1371,1246 1346.13,1246 1270,1232 1255,1184 1255,9 1935,9 1935,992 1371,992
GND on Top Layer "Top Layer-No Net" (solid, remove dead copper, pour order 14): 1935,1717 1935,985 1360,985 1360,1251 1410,1251 1410,1279 1441,1279 1441,1216 1448,1208 1590,1208 1599,1217 1599,1415 1481,1415 1481,1717
GND on Top Layer "Top Layer-No Net" (solid, remove dead copper, pour order 12): 9,2580 1935,2580 1935,1704 730,1704 730,1624 457,1624 457,1340 9,1340 9,1704

## Other copper
Top Layer:
  pour cut-out: 1743,56.5 cw(c1743,155) 1644.5,155 cw(c1743,155) 1743,253.5 cw(c1743,155) 1841.5,155 cw(c1743,155)
  pour cut-out: 1743,2290.5 cw(c1743,2389) 1644.5,2389 cw(c1743,2389) 1743,2487.5 cw(c1743,2389) 1841.5,2389 cw(c1743,2389)
  pour cut-out: 200,2290.5 cw(c200,2389) 101.5,2389 cw(c200,2389) 200,2487.5 cw(c200,2389) 298.5,2389 cw(c200,2389)
  pour cut-out: 200,56.5 cw(c200,155) 101.5,155 cw(c200,155) 200,253.5 cw(c200,155) 298.5,155 cw(c200,155)
Bottom Layer:
  pour cut-out: 1743,56.5 cw(c1743,155) 1644.5,155 cw(c1743,155) 1743,253.5 cw(c1743,155) 1841.5,155 cw(c1743,155)
  pour cut-out: 1743,2290.5 cw(c1743,2389) 1644.5,2389 cw(c1743,2389) 1743,2487.5 cw(c1743,2389) 1841.5,2389 cw(c1743,2389)
  pour cut-out: 200,2290.5 cw(c200,2389) 101.5,2389 cw(c200,2389) 200,2487.5 cw(c200,2389) 298.5,2389 cw(c200,2389)
  pour cut-out: 200,56.5 cw(c200,155) 101.5,155 cw(c200,155) 200,253.5 cw(c200,155) 298.5,155 cw(c200,155)

## Silkscreen, mask and mechanical layers (free items; w line width, h text height)
Top Overlay:
  text "5V" at 1048,2516 h30
  text "3.3V" at 1277,2500 h30
  text "RESET" at 1747,2083 h30
  text "RES_9" at 1241,1097.91 h30
  text "RES_8" at 1241,1023.1 h30
  text "RES_7" at 1241,862.91 h30
  text "RES_6" at 1241,788.1 h30
  text "RES_5" at 1241,627.91 h30
  text "RES_4" at 1241,553.1 h30
  text "RES_3" at 1241,393 h30
  text "RES_2" at 1241,318 h30
  text "RES_1" at 1241,158 h30
  text "RES_0" at 1241,83 h30
Mechanical 1:
  circle w0.5: c200,155 r88.5
  circle w0.5: c1743,2389 r88.5
  circle w0.5: c200,2389 r88.5
  circle w0.5: c1743,155 r88.5
  lines w0.5: 0,0 1944,0 1944,2589 0,2589 0,0